# EAGLE board Interfaz Motor Maxon (EAGLE 9.6.2)
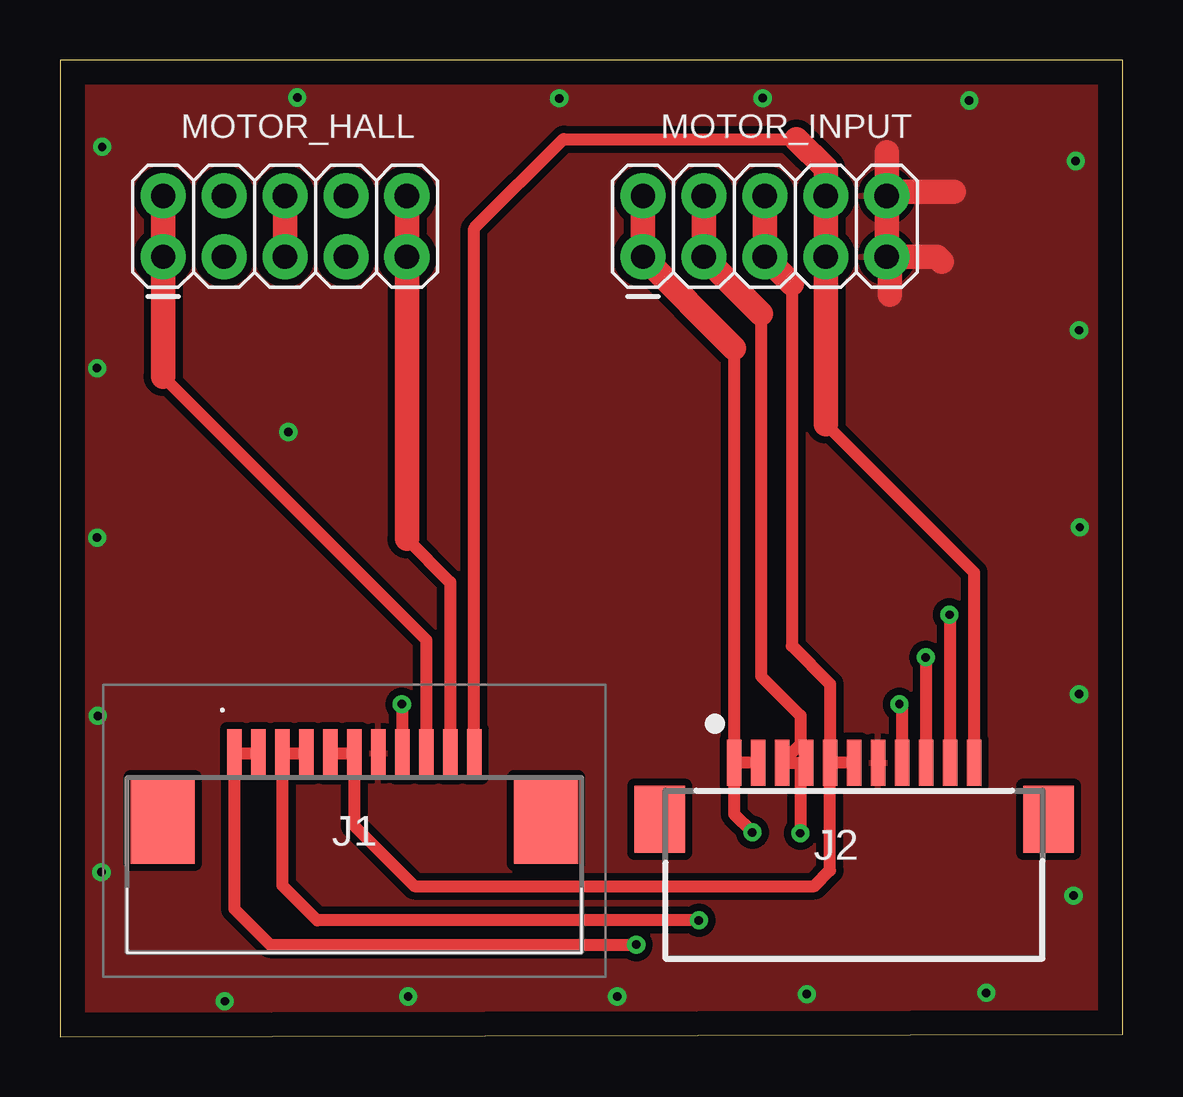
[diagram p0: board, top side]
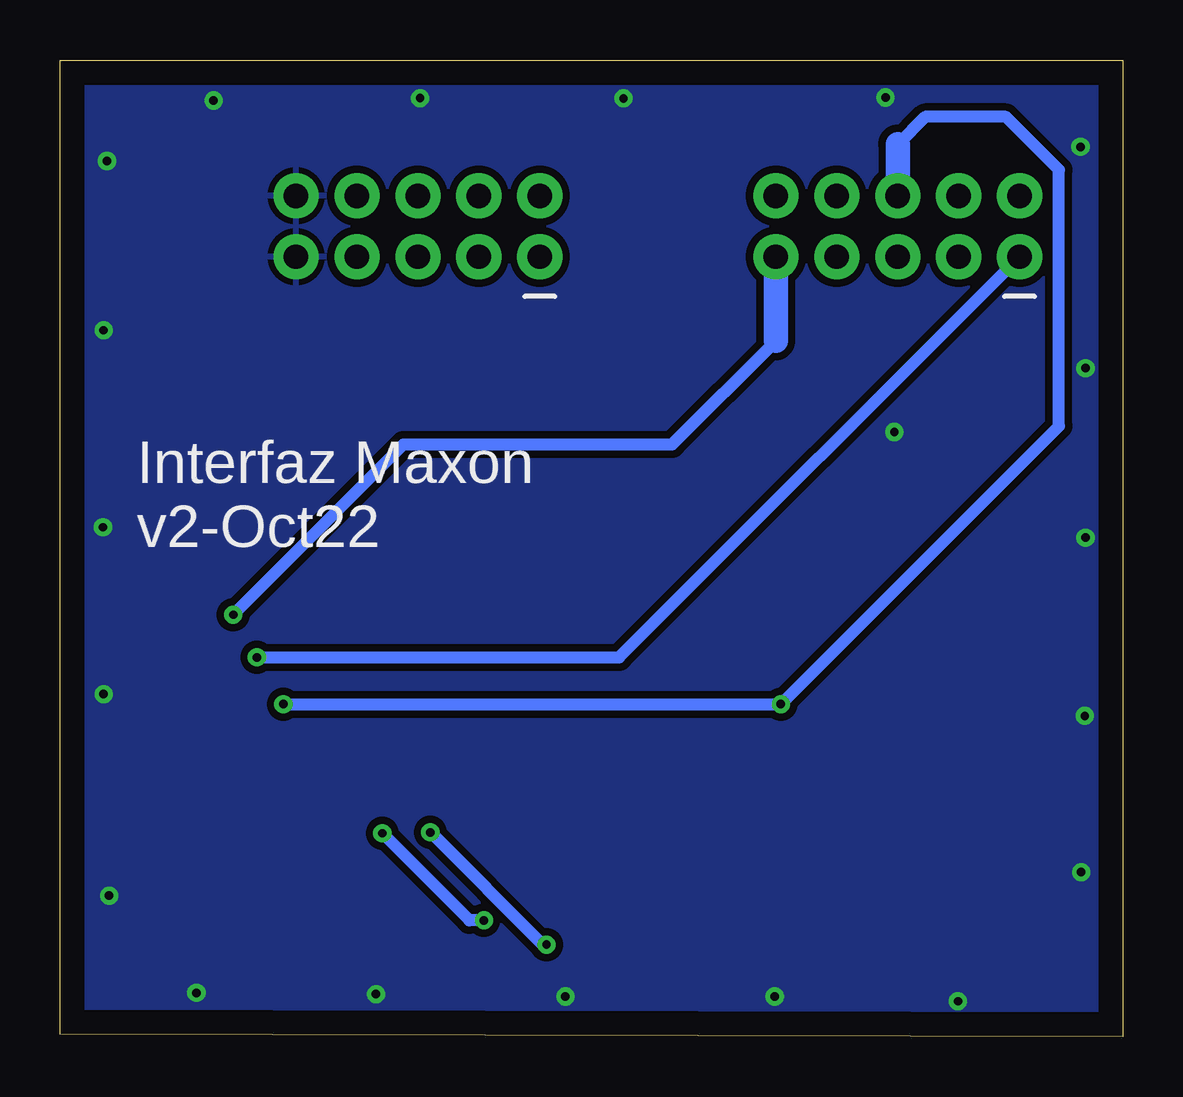
[diagram p1: board, bottom side, seen from below]

Size 44.3 x 40.7 mm. Coordinates in mm from the lower left corner, seen from the top.
Outline: 0,0 44.3,0.1 44.3,40.69 0,40.7 0,0
Copper layers (1*16): Top 0.035mm / dielectric 1.5mm / Bottom 0.035mm
Design rules "default *": minimum track width 6mil, minimum drill 0.35mm, track to track 12mil, track to pad 12mil, pad to pad 12mil, via to via 12mil, smd to smd 6mil, copper to edge 40mil, drill to drill 6mil, minimum pad ring 10mil, minimum via ring 8mil, stop-mask expansion 4mil, vias tented up to drill 0mil, thermal gap 10mil

## Footprints (pad centres in the part's own frame; a part is rotated, then mirrored left to right if it is on the bottom)
1849531 = smd 0.61 x 2: 1 -5,4.15; 2 -4,4.15; 3 -3,4.15; 4 -2,4.15; 5 -1,4.15; 6 0,4.15; 7 1,4.15; 8 2,4.15; 9 3,4.15; 10 4,4.15; 11 5,4.15 | smd 2.68 x 3.6: MP1 -7.99,1.35; MP2 7.99,1.35
52207-1133 = smd 0.6 x 1.9: 1 -5,0; 2 -4,0; 3 -3,0; 4 -2,0; 5 -1,0; 6 0,0; 7 1,0; 8 2,0; 9 3,0; 10 4,0; 11 5,0 | smd 2.1 x 2.8: 12 -8.105,-2.35; 13 8.105,-2.35
2X5 = drill 1.016 pad 1.88: 1 0,0; 2 0,2.54; 3 2.54,0; 4 2.54,2.54; 5 5.08,0; 6 5.08,2.54; 7 7.62,0; 8 7.62,2.54; 9 10.16,0; 10 10.16,2.54

## Placement (x,y rotation side)
J1  1-84953-1  [1849531]  12.27,7.66 0 top
J2  52207-1133  [52207-1133]  33.1,11.42 0 top
MOTOR_HALL  [2X5]  4.3,32.5 0 top
MOTOR_INPUT  [2X5]  24.3,32.5 0 top

## Library data of the parts
J1 = 1-84953-1; ARROW_PART_NUMBER: 1-84953-1; ARROW_PRICE-STOCK: https://www.arrow.com/en/products/1-84953-1/te-connectivity?region=nac; DESCRIPTION: 1MM FPC HORZ.TOP CONT.ASSY 11P; HEIGHT: 2.74mm; MANUFACTURER_NAME: TE Connectivity; MANUFACTURER_PART_NUMBER: 1-84953-1; MOUSER_PART_NUMBER: 571-1-84953-1; MOUSER_PRICE-STOCK: https://www.mouser.co.uk/ProductDetail/TE-Connectivity/1-84953-1?qs=uUkeXfjQ8uQbyHjuXR99Yw%3D%3D
J2 = 52207-1133; DESCRIPTION: FFC & FPC Connectors 1.0 FPC ZIF 11Ckt Sn-Ag-Bi; HEIGHT: mm; MANUFACTURER_NAME: Molex; MANUFACTURER_PART_NUMBER: 52207-1133; MOUSER_PART_NUMBER: 538-52207-1133; MOUSER_PRICE-STOCK: https://www.mouser.co.uk/ProductDetail/Molex/52207-1133?qs=rw2VfpiI%2FsMfVoKouvnHSg%3D%3D
MOTOR_HALL MOTOR_INPUT = SparkFun-Connectors; PROD_ID: CONN-08499; SF_ID: PRT-0778

## Nets
GND: J1.7 J2.7 MOTOR_INPUT.9 MOTOR_INPUT.10
HALL_A: J1.9 J2.9 MOTOR_HALL.1 MOTOR_HALL.2
HALL_B: J1.8 J2.8 MOTOR_HALL.5 MOTOR_HALL.6
HALL_C: J1.10 J2.10 MOTOR_HALL.9 MOTOR_HALL.10
MOTOR_A: J1.1 J1.2 J2.1 J2.2 MOTOR_INPUT.1 MOTOR_INPUT.2
MOTOR_B: J1.3 J1.4 J2.3 J2.4 MOTOR_INPUT.3 MOTOR_INPUT.4
MOTOR_C: J1.5 J1.6 J2.5 J2.6 MOTOR_INPUT.5 MOTOR_INPUT.6
VBUSBAR: J1.11 J2.11 MOTOR_INPUT.7 MOTOR_INPUT.8

## Tracks (layer width: path | path; a pad name or v marks a point on that pad's centre or on a via)
GND  (via drill 0.35)
  Top 1.016: MOTOR_INPUT.9 36.56,32.5 36.77,32.29 | MOTOR_INPUT.9 34.59,32.37 34.59,30.91 | MOTOR_INPUT.9 MOTOR_INPUT.10 | MOTOR_INPUT.10 34.46,36.85 34.47,36.86 | MOTOR_INPUT.10 34.63,35.21 37.26,35.21
  other vias: 1.76,37.08 1.55,27.86 1.55,20.8 1.58,13.37 1.73,6.86 6.87,1.48 14.51,1.68 23.23,1.68 31.13,1.78 38.61,1.83 42.25,5.88 42.48,14.28 42.51,21.23 42.48,29.44 42.34,36.49 37.9,39.01 29.29,39.11 20.81,39.1 9.89,39.14 9.52,25.2
  pour Top: -1.8,41.5 45.3,41.5 45.3,-0.5 -1.8,-0.5
  pour Bottom: -1.4,41.5 45.3,41.5 45.3,-0.5 -1.4,-0.5
HALL_A  (via drill 0.35)
  Top 0.508: J1.9 15.27,16.54 4.3,27.51 | v36.09,15.81 v36.1,15.8 J2.9
  Top 1.016: MOTOR_HALL.2 MOTOR_HALL.1 4.3,27.51
  Bottom 0.508: v36.09,15.81 20.99,15.81 MOTOR_HALL.1
HALL_B  (via drill 0.35)
  Top 0.508: v14.25,13.86 14.27,13.84 J1.8 | v34.99,13.86 35.1,13.75 J2.8
  Top 1.016: MOTOR_HALL.6 MOTOR_HALL.5
  Bottom 0.508: v34.99,13.86 v14.25,13.86 2.66,25.45 2.66,36.12 4.87,38.33 8.24,38.33 9.38,37.19
  Bottom 1.016: 9.38,37.19 MOTOR_HALL.6
HALL_C  (via drill 0.35)
  Top 0.508: 14.46,20.75 16.27,18.94 J1.10 | v37.08,17.59 37.1,17.57 J2.10
  Top 1.016: MOTOR_HALL.10 MOTOR_HALL.9 14.46,20.75
  Bottom 0.508: v37.08,17.59 29.98,24.68 18.78,24.68 14.46,29
  Bottom 1.016: 14.46,29 MOTOR_HALL.9
MOTOR_A  (via drill 0.35)
  Top 0.508: 28.1,28.7 J2.1 | J2.2 J2.1 | J1.2 J1.1 7.27,5.33 8.76,3.84 v24.02,3.84 | J2.1 28.1,9.28 v28.86,8.52
  Top 1.016: MOTOR_INPUT.2 MOTOR_INPUT.1 28.1,28.7
  Bottom 0.508: v28.86,8.52 24.18,3.84 v24.02,3.84
MOTOR_B  (via drill 0.35)
  Top 0.508: 29.22,30.12 29.22,15.03 30.87,13.38 30.87,12.19 J2.3 J2.4 31.01,11.42 30.86,11.27 v30.86,8.48 | J1.4 J1.3 9.27,6.31 10.73,4.85 v26.63,4.85
  Top 1.016: MOTOR_INPUT.4 MOTOR_INPUT.3 29.22,30.12
  Bottom 0.508: v30.86,8.48 27.23,4.85 v26.63,4.85
MOTOR_C
  Top 0.508: 30.51,31.37 30.51,16.29 32.1,14.7 J2.5 | J2.5 32.1,6.93 31.45,6.28 14.78,6.28 12.27,8.79 J1.6 J1.5 | J2.6 J2.5
  Top 1.016: MOTOR_INPUT.6 MOTOR_INPUT.5 30.51,31.37
VBUSBAR
  Top 0.508: J2.11 38.1,19.35 31.92,25.53 | J1.11 17.27,33.68 20.99,37.4 30.7,37.4
  Top 1.016: 31.92,25.53 MOTOR_INPUT.7 MOTOR_INPUT.8 31.92,36.18 30.7,37.4

## Text on the board
bPlace: Interfaz Maxon / v2-Oct22